# EAGLE board mcat-4cu-b-v2b.job (EAGLE 6.5.0)
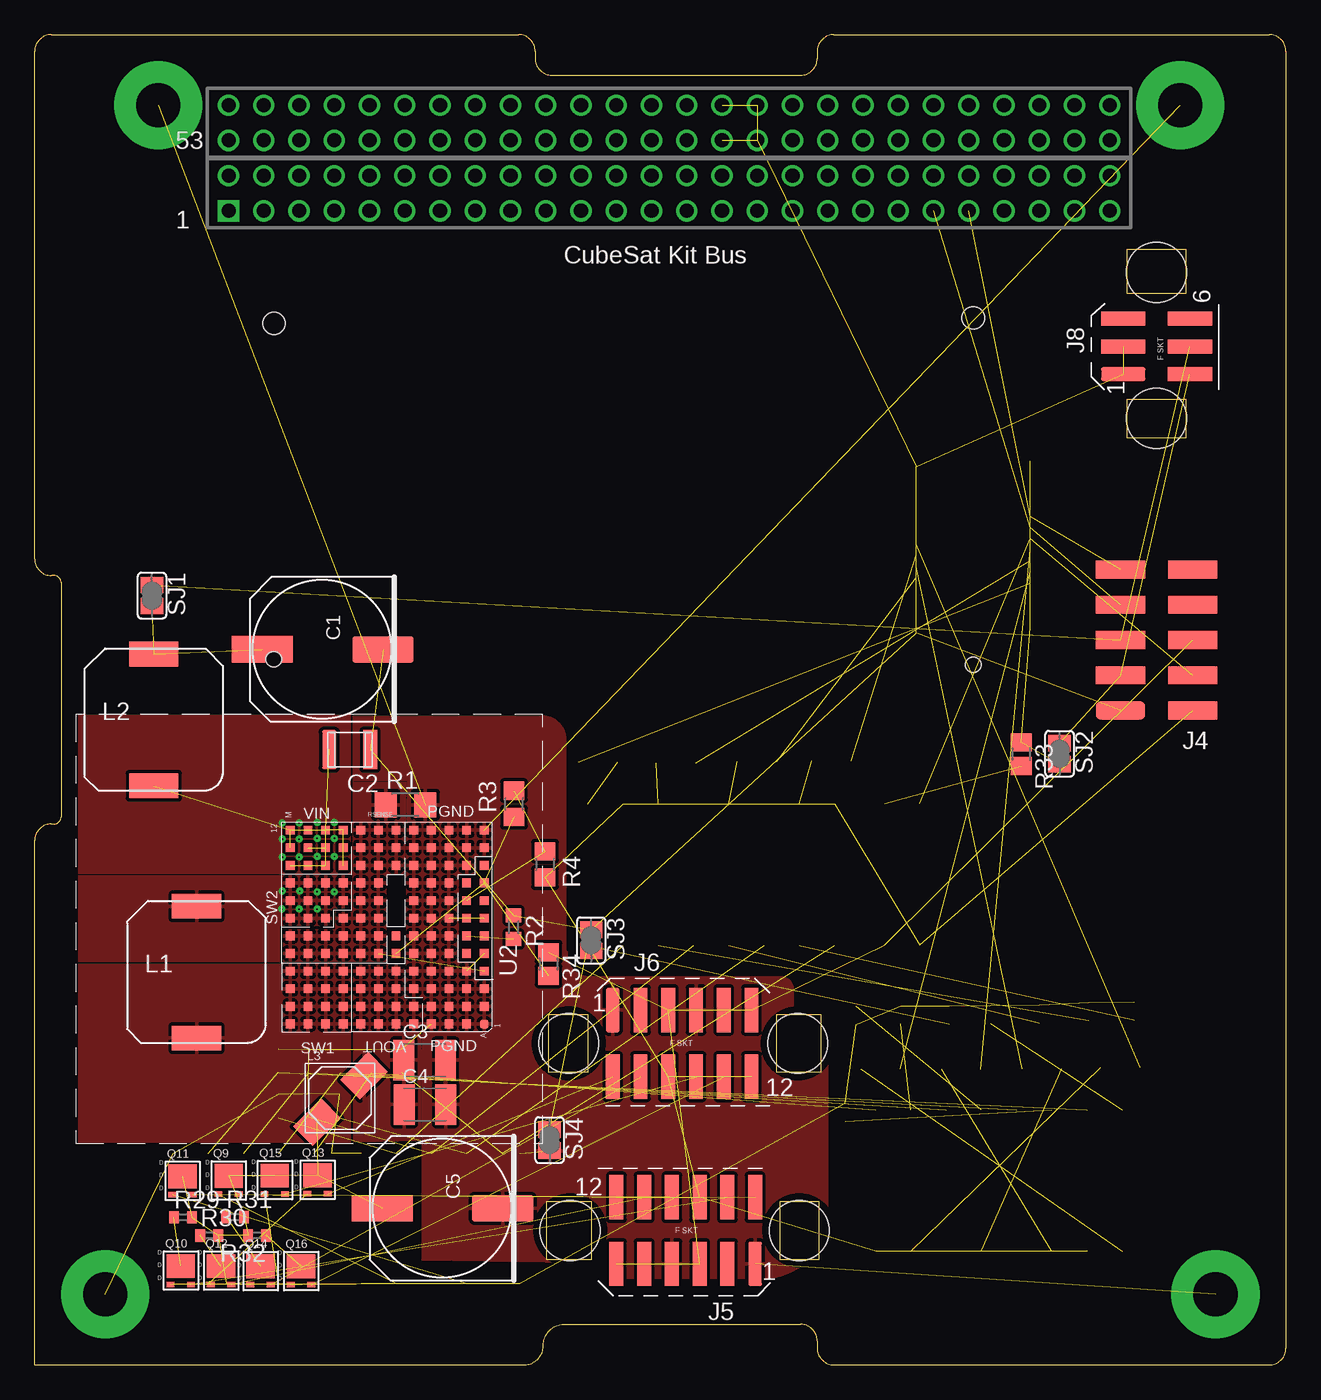
[diagram p0: board, top side]
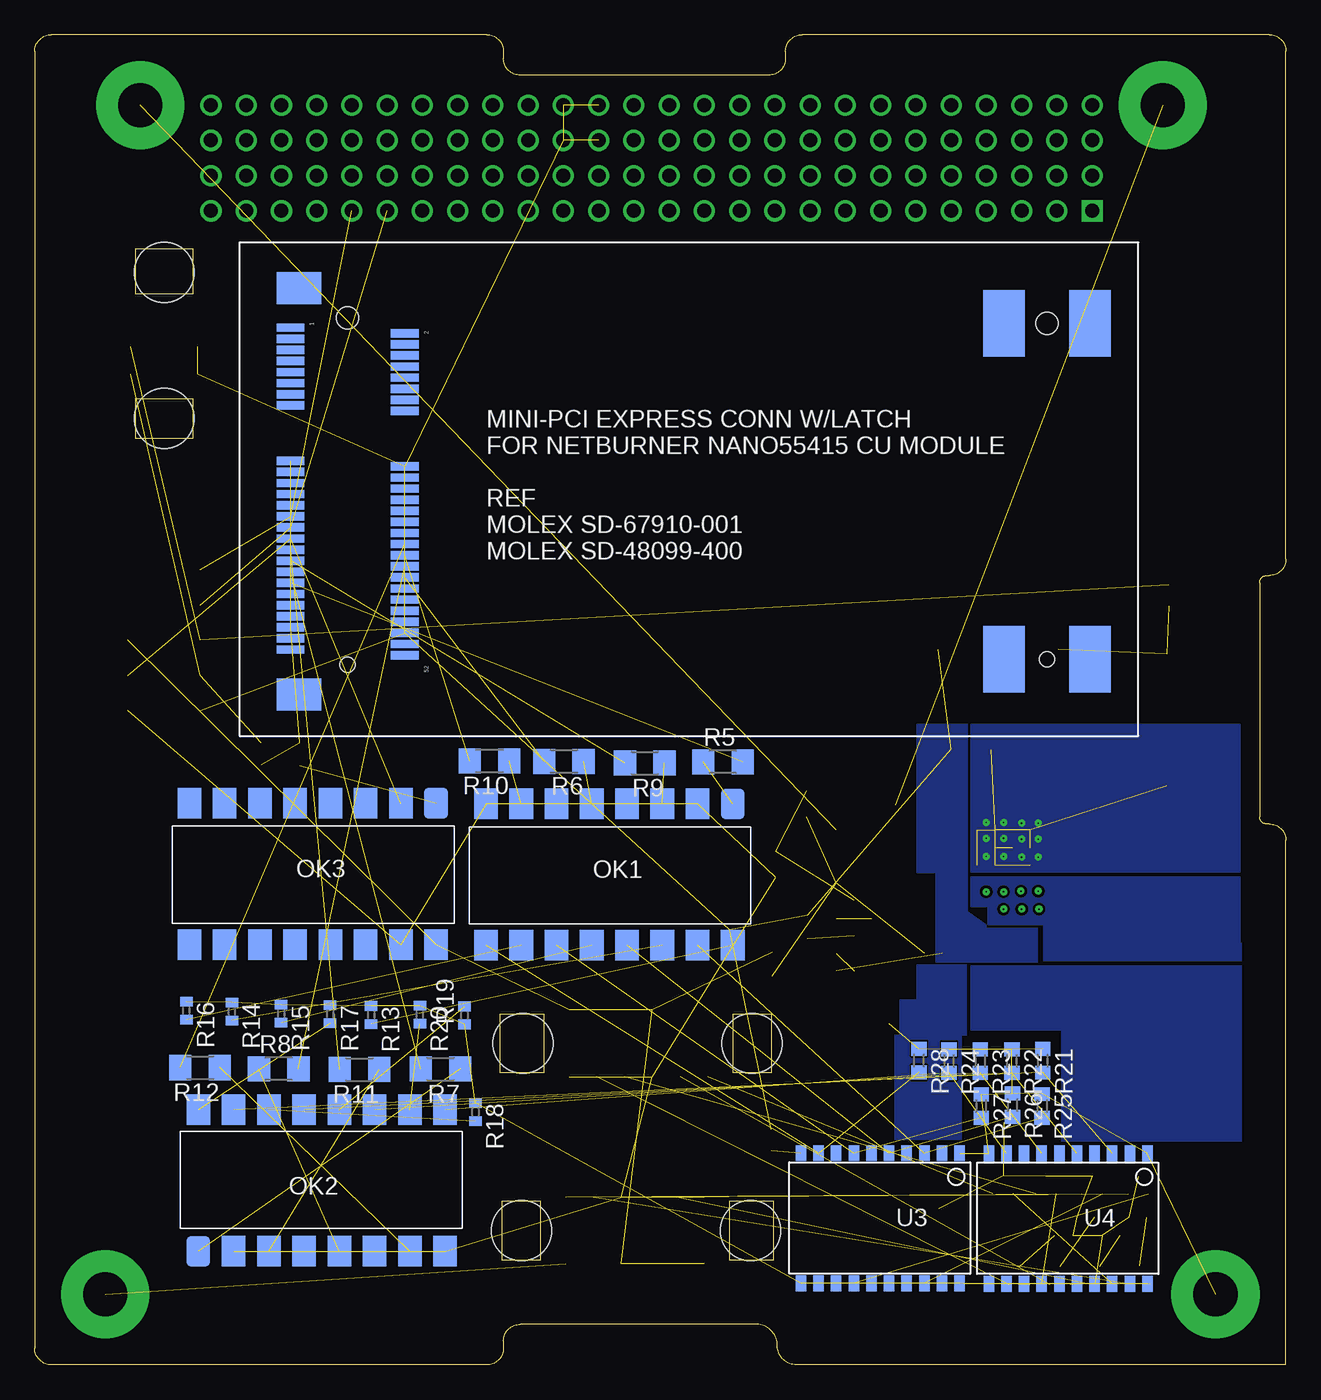
[diagram p1: board, bottom side, seen from below]

Size 90.17 x 95.89 mm. Coordinates in mm from the lower left corner, seen from the top.
Outline: 0,0 34.87,0 35.28,0 arc90 36.65,1.37 arc-90 38.12,2.92 55.19,2.92 arc-90 56.39,1.73 56.39,1.19 arc90 57.58,0 88.98,0 arc90 90.17,1.19 90.17,94.69 arc90 88.98,95.89 57.58,95.89 arc90 56.39,94.69 56.39,94.16 arc-90 55.19,92.96 37.26,92.96 arc-90 36.07,94.16 36.07,94.69 arc90 34.87,95.89 1.19,95.89 arc90 0,94.69 0,58.09 arc90 1.19,56.9 1.4,56.9 arc-90 1.91,56.39 1.91,39.5 arc-90 1.4,38.99 1.19,38.99 arc90 0,37.8 0,0
Copper layers [2:(1+(2*15)+16):15]: Top 0.0694mm / dielectric 8mil / Route2 0.0347mm / dielectric 3.5mil / Route15 0.0347mm / dielectric 8mil / Bottom 0.0694mm
Design rules "SSC-EAGLE-6Lyr_v1.0.0.3 *": minimum track width 6mil, minimum drill 6mil, track to track 6mil, track to pad 6mil, pad to pad 6mil, via to via 6mil, smd to smd 6mil, copper to edge 20mil, drill to drill 16mil, minimum pad ring 8mil, minimum via ring 8mil, stop-mask expansion 3mil, vias tented up to drill 0mil, thermal gap 10mil
Net classes: 0 default: clearance 0.205 mm; 1 vout1a2ozcu: width 0.406 mm; 2 vin3a2ozcu: width 1.778 mm

## Footprints (pad centres in the part's own frame; a part is rotated, then mirrored left to right if it is on the bottom)
OS-CON-SVPF-F12 = smd 1.9 x 4.4: A1 0,-4.3; K1 0,4.4
MLCC-X7R-1210 = smd 1 x 2.8: 1 1.6,0.05; 2 -1.35,0.05
C1210K = smd 1.5 x 2.9: 1 -1.5,0; 2 1.5,0
CSK_MOUNTING_HOLE = drill 3.175 pad 6.35: P$1 0,0
CSK-BUS-PKG = drill 1.016 pad 1.524 square: 1 -29.21,-3.81 | drill 1.016 pad 1.524: 2 -29.21,-1.27; 3 -26.67,-3.81; 4 -26.67,-1.27; 5 -24.13,-3.81; 6 -24.13,-1.27; 7 -21.59,-3.81; 8 -21.59,-1.27; 9 -19.05,-3.81; 10 -19.05,-1.27; 11 -16.51,-3.81; 12 -16.51,-1.27; 13 -13.97,-3.81; 14 -13.97,-1.27; 15 -11.43,-3.81; 16 -11.43,-1.27; 17 -8.89,-3.81; 18 -8.89,-1.27; 19 -6.35,-3.81; 20 -6.35,-1.27; 21 -3.81,-3.81; 22 -3.81,-1.27; 23 -1.27,-3.81; 24 -1.27,-1.27; 25 1.27,-3.81; 26 1.27,-1.27; 27 3.81,-3.81; 28 3.81,-1.27; 29 6.35,-3.81; 30 6.35,-1.27; 31 8.89,-3.81; 32 8.89,-1.27; 33 11.43,-3.81; 34 11.43,-1.27; 35 13.97,-3.81; 36 13.97,-1.27; 37 16.51,-3.81; 38 16.51,-1.27; 39 19.05,-3.81; 40 19.05,-1.27; 41 21.59,-3.81; 42 21.59,-1.27; 43 24.13,-3.81; 44 24.13,-1.27; 45 26.67,-3.81; 46 26.67,-1.27; 47 29.21,-3.81; 48 29.21,-1.27; 49 31.75,-3.81; 50 31.75,-1.27; 51 34.29,-3.81; 52 34.29,-1.27; 53 -29.21,1.27; 54 -29.21,3.81; 55 -26.67,1.27; 56 -26.67,3.81; 57 -24.13,1.27; 58 -24.13,3.81; 59 -21.59,1.27; 60 -21.59,3.81; 61 -19.05,1.27; 62 -19.05,3.81; 63 -16.51,1.27; 64 -16.51,3.81; 65 -13.97,1.27; 66 -13.97,3.81; 67 -11.43,1.27; 68 -11.43,3.81; 69 -8.89,1.27; 70 -8.89,3.81; 71 -6.35,1.27; 72 -6.35,3.81; 73 -3.81,1.27; 74 -3.81,3.81; 75 -1.27,1.27; 76 -1.27,3.81; 77 1.27,1.27; 78 1.27,3.81; 79 3.81,1.27; 80 3.81,3.81; 81 6.35,1.27; 82 6.35,3.81; 83 8.89,1.27; 84 8.89,3.81; 85 11.43,1.27; 86 11.43,3.81; 87 13.97,1.27; 88 13.97,3.81; 89 16.51,1.27; 90 16.51,3.81; 91 19.05,1.27; 92 19.05,3.81; 93 21.59,1.27; 94 21.59,3.81; 95 24.13,1.27; 96 24.13,3.81; 97 26.67,1.27; 98 26.67,3.81; 99 29.21,1.27; 100 29.21,3.81; 101 31.75,1.27; 102 31.75,3.81; 103 34.29,1.27; 104 34.29,3.81
AMPMODU-SMT-PIN-HEADER-5X2 = smd 1.27 x 3.556: 1 -4.826,2.54; 2 -2.286,2.54; 3 0.254,2.54; 4 2.794,2.54; 5 5.334,2.54; 6 -4.826,-2.667; 7 -2.286,-2.667; 8 0.254,-2.667; 9 2.794,-2.667; 10 5.334,-2.667
M80-68112 = smd 1 x 3.2: 1 0,2.4; 2 2,2.4; 3 4,2.4; 4 6,2.4; 5 8,2.4; 6 10,2.4; 7 0,-2.4; 8 2,-2.4; 9 4,-2.4; 10 6,-2.4; 11 8,-2.4; 12 10,-2.4 | hole 4.318: -3.175,0; 13.335,0
M80-68106 = smd 1 x 3.2: 1 -2,2.4; 2 0,2.4; 3 2,2.4; 4 -2,-2.4; 5 0,-2.4; 6 2,-2.4 | hole 4.318: -5.175,0; 5.335,0
MSS1048 = smd 3.56 x 1.78: 1 5,9.85; 2 5,0.35
SERIES-POWER-INDUCTORS = smd 2.85 x 2 rotated 45: 1 1.75,1.6; 2 -1.65,-1.75
PS2501L-4 = smd 2.2 x 1.7: 1 -1.6,19.03; 2 -1.6,16.49; 3 -1.6,13.95; 4 -1.6,11.41; 5 -1.6,8.87; 6 -1.6,6.33; 7 -1.6,3.79; 8 -1.6,1.25; 9 8.6,1.25; 10 8.6,3.79; 11 8.6,6.33; 12 8.6,8.87; 13 8.6,11.41; 14 8.6,13.95; 15 8.6,16.49; 16 8.6,19.03
1206-8-CHIPFET = smd 2.032 x 1.727: D 0,1.321 | smd 0.559 x 0.406: G -0.736,0; S 0.736,0
R1206 = smd 1.6 x 1.803: 1 -1.422,0; 2 1.422,0
R0603 = smd 1 x 1.1: 1 -0.85,0; 2 0.85,0
R0805 = smd 1.3 x 1.5: 1 -0.95,0; 2 0.95,0
R0402 = smd 0.7 x 0.9: 1 -0.65,0; 2 0.65,0
R0805' = smd 1.3 x 1.5: 1 -0.85,0; 2 0.85,0
SJ = smd 1.168 x 1.6: 1 -0.762,0; 2 0.762,0
MOLEX-MINI-PCI-EXPRESS-8MM-52CKT = smd 0.6 x 2: 1 -11.65,-26.8; 2 -11.248,-18.576; 3 -10.85,-26.8; 4 -10.447,-18.576; 5 -10.05,-26.8; 6 -9.648,-18.576; 7 -9.25,-26.8; 8 -8.848,-18.576; 9 -8.45,-26.8; 10 -8.047,-18.576; 11 -7.65,-26.8; 12 -7.247,-18.576; 13 -6.85,-26.8; 14 -6.447,-18.576; 15 -6.05,-26.8; 16 -5.647,-18.576; 17 -2.05,-26.8; 18 -1.647,-18.576; 19 -1.25,-26.8; 20 -0.848,-18.576; 21 -0.45,-26.8; 22 -0.048,-18.576; 23 0.35,-26.8; 24 0.752,-18.576; 25 1.15,-26.8; 26 1.552,-18.576; 27 1.95,-26.8; 28 2.353,-18.576; 29 2.75,-26.8; 30 3.152,-18.576; 31 3.55,-26.8; 32 3.953,-18.576; 33 4.35,-26.8; 34 4.753,-18.576; 35 5.15,-26.8; 36 5.553,-18.576; 37 5.95,-26.8; 38 6.353,-18.576; 39 6.75,-26.8; 40 7.152,-18.576; 41 7.55,-26.8; 42 7.952,-18.576; 43 8.35,-26.8; 44 8.752,-18.576; 45 9.15,-26.8; 46 9.553,-18.576; 47 9.95,-26.8; 48 10.352,-18.576; 49 10.75,-26.8; 50 11.152,-18.576; 51 11.55,-26.8; 52 11.953,-18.576 | smd 2.3 x 3.2: P$1 -14.5,-26.2; P$2 14.8,-26.2 | smd 4.8 x 3: P$3 12.25,24.6; P$4 -11.95,24.6; P$5 -11.95,30.8; P$6 12.25,30.8 | hole 1.6: -12.35,-22.7; -11.95,27.7 | hole 1.1: 12.65,-22.7; 12.25,27.7
LGA-141-LTC-05-08-1840-B = smd 0.63 x 0.63: A1 -7.116,-10.192; A2 -5.846,-10.192; A3 -4.576,-10.192; A4 -3.306,-10.192; A5 -2.036,-10.192; A6 -0.766,-10.192; A7 0.504,-10.192; A8 1.774,-10.192; A9 3.044,-10.192; A10 4.314,-10.192; A11 5.584,-10.192; A12 6.854,-10.192; B1 -7.116,-8.922; B2 -5.846,-8.922; B3 -4.576,-8.922; B4 -3.306,-8.922; B5 -2.036,-8.922; B6 -0.766,-8.922; B7 0.504,-8.922; B8 1.774,-8.922; B9 3.044,-8.922; B10 4.314,-8.922; B11 5.584,-8.922; B12 6.854,-8.922; C1 -7.116,-7.652; C2 -5.846,-7.652; C3 -4.576,-7.652; C4 -3.306,-7.652; C5 -2.036,-7.652; C6 -0.766,-7.652; C7 0.504,-7.652; C8 1.774,-7.652; C9 3.044,-7.652; C10 4.314,-7.652; C11 5.584,-7.652; C12 6.854,-7.652; D1 -7.116,-6.382; D2 -5.846,-6.382; D3 -4.576,-6.382; D4 -3.306,-6.382; D5 -2.036,-6.382; D6 -0.766,-6.382; D7 0.504,-6.382; D8 1.774,-6.382; D9 3.044,-6.382; D10 4.314,-6.382; D11 5.584,-6.382; D12 6.854,-6.382; E1 -7.116,-5.112; E2 -5.846,-5.112; E3 -4.576,-5.112; E4 -3.306,-5.112; E5 -2.036,-5.112; E6 -0.766,-5.112; E7 0.504,-5.112; E8 1.774,-5.112; E9 3.044,-5.112; E10 4.314,-5.112; E11 5.584,-5.112; E12 6.854,-5.112; F1 -7.116,-3.842; F2 -5.846,-3.842; F3 -4.576,-3.842; F4 -3.306,-3.842; F5 -2.036,-3.842; F6 -0.766,-3.842; F10 4.314,-3.842; F11 5.584,-3.842; F12 6.854,-3.842; G1 -7.116,-2.572; G2 -5.846,-2.572; G3 -4.576,-2.572; G4 -3.306,-2.572; G5 -2.036,-2.572; G6 -0.766,-2.572; G7 0.504,-2.572; G8 1.774,-2.572; G9 3.044,-2.572; G10 4.314,-2.572; G11 5.584,-2.572; G12 6.854,-2.572; H2 -5.846,-1.302; H3 -4.576,-1.302; H4 -3.306,-1.302; H5 -2.036,-1.302; H6 -0.766,-1.302; H7 0.504,-1.302; H8 1.774,-1.302; H9 3.044,-1.302; H10 4.314,-1.302; H11 5.584,-1.302; H12 6.854,-1.302; J5 -2.036,-0.032; J6 -0.766,-0.032; J7 0.504,-0.032; J8 1.774,-0.032; J9 3.044,-0.032; J10 4.314,-0.032; J11 5.584,-0.032; J12 6.854,-0.032; K5 -2.036,1.238; K6 -0.766,1.238; K7 0.504,1.238; K8 1.774,1.238; K9 3.044,1.238; K10 4.314,1.238; K11 5.584,1.238; K12 6.854,1.238; L5 -2.036,2.508; L6 -0.766,2.508; L7 0.504,2.508; L8 1.774,2.508; L9 3.044,2.508; L10 4.314,2.508; L11 5.584,2.508; L12 6.854,2.508; M5 -2.036,3.778; M6 -0.766,3.778; M7 0.504,3.778; M8 1.774,3.778; M9 3.044,3.778; M10 4.314,3.778; M11 5.584,3.778; M12 6.854,3.778; SW1@J1 -7.116,-0.032; SW1@J2 -5.846,-0.032; SW1@J3 -4.576,-0.032; SW1@J4 -3.306,-0.032; SW1@K1 -7.116,1.238; SW1@K2 -5.846,1.238; SW1@K3 -4.576,1.238; SW1@K4 -3.306,1.238; SW1@L1 -7.116,2.508; SW1@L2 -5.846,2.508; SW1@L3 -4.576,2.508; SW1@L4 -3.306,2.508; SW1@M1 -7.116,3.778; SW1@M2 -5.846,3.778; SW1@M3 -4.576,3.778; SW1@M4 -3.306,3.778; VOUT -7.116,-1.302
20-LEAD-PLASTIC-SO = smd 0.762 x 1.143: 1 0,0; 2 1.27,0; 3 2.54,0; 4 3.81,0; 5 5.08,0; 6 6.35,0; 7 7.62,0; 8 8.89,0; 9 10.16,0; 10 11.43,0; 11 11.43,9.398; 12 10.16,9.398; 13 8.89,9.398; 14 7.62,9.398; 15 6.35,9.398; 16 5.08,9.398; 17 3.81,9.398; 18 2.54,9.398; 19 1.27,9.398; 20 0,9.398

## Placement (x,y rotation side)
C1  68uF  [OS-CON-SVPF-F12]  20.7,51.57 270 top
C2  4.7uF  [MLCC-X7R-1210]  22.83,44.4 180 top
C3  10uF  [C1210K]  28.1,21.97 0 top
C4  10uF  [C1210K]  28.13,18.76 0 top
C5  68uF  [OS-CON-SVPF-F12]  29.34,11.28 270 top
H1  MOUNT-PAD-ROUNDCSK_MTG_HOLE_A5  [CSK_MOUNTING_HOLE]  8.89,90.81 0 top
H2  MOUNT-PAD-ROUNDCSK_MTG_HOLE_A5  [CSK_MOUNTING_HOLE]  82.55,90.81 0 top
H3  MOUNT-PAD-ROUNDCSK_MTG_HOLE_A5  [CSK_MOUNTING_HOLE]  85.09,5.08 0 top
HBL  MOUNT-PAD-ROUNDCSK_MTG_HOLE_A5  [CSK_MOUNTING_HOLE]  5.08,5.08 0 top
J2  [CSK-BUS-PKG]  43.18,87 0 top
J4  AMPMODU 5X2 SMT HDR  [AMPMODU-SMT-PIN-HEADER-5X2]  80.78,51.99 90 top
J5  M80-6811242  [M80-68112]  51.92,9.68 180 top
J6  M80-6811242  [M80-68112]  41.66,23.17 0 top
J8  M80-6810642  [M80-68106]  80.84,73.41 90 top
L1  330 uH  [MSS1048]  6.66,23.2 0 top
L2  33 uH  [MSS1048]  3.58,41.39 0 top
L3  10 uH  [SERIES-POWER-INDUCTORS]  21.99,19.23 0 top
OK1  PS2501L-4  [PS2501L-4]  58.9,38.84 270 bottom
OK2  PS2501L-4  [PS2501L-4]  59.34,9.79 90 bottom
OK3  PS2501L-4  [PS2501L-4]  80.28,38.88 270 bottom
Q9  SI5404BDC  [1206-8-CHIPFET]  13.98,12.3 0 top
Q10  SI5404BDC  [1206-8-CHIPFET]  10.53,5.8 0 top
Q11  SI5404BDC  [1206-8-CHIPFET]  10.65,12.27 0 top
Q12  SI5404BDC  [1206-8-CHIPFET]  13.42,5.8 0 top
Q13  SI5404BDC  [1206-8-CHIPFET]  20.38,12.34 0 top
Q14  SI5404BDC  [1206-8-CHIPFET]  16.27,5.77 0 top
Q15  SI5404BDC  [1206-8-CHIPFET]  17.3,12.32 0 top
Q16  SI5404BDC  [1206-8-CHIPFET]  19.19,5.77 0 top
R1  70 mOhms  [R1206]  26.72,40.37 0 top
R2  4k7 0.1%  [R0603]  34.5,31.54 270 top
R3  3K79  [R0805]  34.54,40.43 90 top
R4  1K  [R0805]  36.78,36.07 270 top
R5  5K42 0.1%  [R1206]  40.58,43.47 0 bottom
R6  5K42 0.1%  [R1206]  52.04,43.51 180 bottom
R7  5K42 0.1%  [R1206]  60.94,21.32 180 bottom
R8  5K42 0.1%  [R1206]  72.59,21.34 0 bottom
R9  5K42 0.1%  [R1206]  46.21,43.37 180 bottom
R10  5K42 0.1%  [R1206]  57.4,43.53 180 bottom
R11  5K42 0.1%  [R1206]  66.77,21.3 180 bottom
R12  5K42 0.1%  [R1206]  78.26,21.42 180 bottom
R13  100K 0.1%  [R0402]  65.92,25.22 270 bottom
R14  100K 0.1%  [R0402]  75.96,25.46 270 bottom
R15  100K 0.1%  [R0402]  72.41,25.31 270 bottom
R16  100K 0.1%  [R0402]  79.24,25.53 270 bottom
R17  100K 0.1%  [R0402]  68.87,25.28 270 bottom
R18  100K 0.1%  [R0402]  58.41,18.22 270 bottom
R19  100K 0.1%  [R0402]  59.2,25.19 90 bottom
R20  100K 0.1%  [R0402]  62.42,25.24 270 bottom
R21  51K 0.1%  [R0603]  17.54,21.92 270 bottom
R22  51K 0.1%  [R0603]  19.75,21.89 270 bottom
R23  51K 0.1%  [R0603]  22.04,21.9 270 bottom
R24  51k 0.1%  [R0603]  24.28,21.89 270 bottom
R25  51K 0.1%  [R0603]  17.57,18.66 270 bottom
R26  51K 0.1%  [R0603]  19.71,18.72 270 bottom
R27  51K 0.1%  [R0603]  21.97,18.65 270 bottom
R28  51k 0.1%  [R0603]  26.45,21.93 270 bottom
R29  0.1R 1% PTC  [R0402]  10.68,10.63 0 top
R30  0.1R 1% PTC  [R0402]  12.58,9.33 0 top
R31  0.1R 1% PTC  [R0402]  14.44,10.66 0 top
R32  0.1R 1% PTC  [R0402]  16.02,9.33 180 top
R33  1K  [R0805']  71.09,44.03 270 top
R34  604R  [R0805']  37.03,28.89 270 top
SJ1  [SJ]  8.45,55.45 270 top
SJ2  [SJ]  73.85,44.05 270 top
SJ3  [SJ]  40.1,30.6 270 top
SJ4  [SJ]  37.1,16.2 270 top
U1  UCAT-4CU-B-CONTROL-UNITNANO55415  [MOLEX-MINI-PCI-EXPRESS-8MM-52CKT]  44.93,63.11 270 bottom
U2  LTM4609MPV#PBF  [LGA-141-LTC-05-08-1840-B]  22.2,31.69 90 top
U3  LT1161ISW  [20-LEAD-PLASTIC-SO]  23.52,15.26 180 bottom
U4  LT1161ISW  [20-LEAD-PLASTIC-SO]  9.98,15.25 180 bottom

## Library data of the parts
C1 C2 C5 J2 J4-J6 J8 L1 L2 OK1-OK3 Q9-Q16 U1-U4 = gwu_mpnl_ucat_v8
C3 C4 R3 R4 R29-R32 = rcl
H1-H3 HBL = mpnl_holes
L3 = gwu_mpnl_ucat_v8; MF: PANASONIC; MPN: ELL5PS100M; OC_FARNELL: 1717452
R1 R2 R5-R28 R33 R34 = resistor
SJ1-SJ4 = jumper

## Nets
CH1_P18H [vout1a2ozcu]: J5.8 Q10.S
CH1_P18L: J5.7 Q9.S
CH1HG: Q10.G U3.16
CH1LG: Q9.G U3.18
CH1S: Q10.D R29.1
CH2_P18H [vout1a2ozcu]: J5.11 Q12.S
CH2_P18L: J5.10 Q11.S
CH2HG: Q12.G U3.12
CH2LG: Q11.G U3.14
CH2S: Q12.D R30.1
CH3_P18H [vout1a2ozcu]: J6.8 Q14.S
CH3_P18L: J6.7 Q13.S
CH3HG: Q14.G U4.16
CH3LG: Q13.G U4.18
CH3S: Q14.D R31.1
CH4_P18H [vout1a2ozcu]: J6.11 Q16.S
CH4_P18L: J6.10 Q15.S
CH4HG: Q16.G U4.12
CH4LG: Q15.G U4.14
CH4S: Q16.D R32.1
GND: C1.K1 C2.2 J2.81 J2.82 J2.83 J2.84 J4.1 J8.1 J8.2 R2.1 SJ3.1 SJ4.1 U1.18 U1.48
I2C(CLK): J2.43 J4.5 U1.27
I2C(DATA): J2.41 J4.4 U1.29
INTVCC: R3.1 R34.2 U2.A9 U2.F5
N$4: OK1.16 R13.2
N$5: OK1.14 R14.2
N$7: OK1.12 R15.2
N$8: R2.2 U2.B6
N$9: OK1.10 R16.2
N$10: OK2.16 R17.2
N$11: OK2.14 R18.2
N$12: OK2.12 R19.2
N$13: OK2.10 R20.2
N$16: OK3.1 R33.2
N$18: J6.5
OK1E1: OK1.15 R25.2 U3.3
OK1E2: OK1.13 R26.2 U3.5
OK1E3: OK1.11 R27.2 U3.7
OK1E4: OK1.9 R28.2 U3.9
OK2E1: OK2.15 R21.2 U4.3
OK2E2: OK2.13 R22.2 U4.5
OK2E3: OK2.11 R23.2 U4.7
OK2E4: OK2.9 R24.2 U4.9
P3: R33.1 SJ2.2 U1.17 U1.47
P3_SW: J4.2 J8.4 SJ2.1
P18_SW1: OK1.1 R5.1
P18_SW2: OK1.5 R6.1
P18_SW3: OK2.1 R7.1
P18_SW4: OK2.5 R8.1
P18_SW5: OK1.3 R9.1
P18_SW6: OK1.7 R10.1
P18_SW7: OK2.3 R11.1
P18_SW8: OK2.7 R12.1
PBATT_SW [vin3a2ozcu]: J4.3 J8.5 SJ1.1
PGND: C3.2 C4.2 C5.K1 H1.P$1 H2.P$1 H3.P$1 HBL.P$1 J5.1 J5.4 J6.1 J6.4 R1.2 R21.1 R22.1 R23.1 R24.1 R25.1 R26.1 R27.1 R28.1 SJ4.2 U2.A1 U2.A2 U2.A3 U2.A5 U2.A7 U2.A11 U2.A12 U2.B1 U2.B2 U2.B3 U2.B4 U2.B10 U2.B11 U2.B12 U2.C1 U2.C2 U2.C3 U2.C4 U2.C5 U2.C6 U2.C7 U2.C8 U2.C9 U2.C10 U2.C11 U2.C12 U2.D1 U2.D2 U2.D3 U2.D4 U2.D5 U2.D6 U2.D7 U2.D8 U2.D9 U2.D10 U2.D11 U2.D12 U2.E3 U2.E4 U2.E5 U2.E6 U2.E7 U2.E8 U2.E9 U2.E10 U2.E11 U2.E12 U3.1 U3.10 U4.1 U4.10
PGOOD_PMA: U2.B5
RSENSE: R1.1 U2.A4 U2.F10 U2.F11 U2.F12 U2.G5 U2.G6 U2.G7 U2.G8 U2.G9 U2.G10 U2.G11 U2.G12 U2.H5 U2.H6 U2.H7 U2.H8 U2.H9 U2.H10 U2.H11 U2.H12 U2.J5 U2.J6 U2.J7 U2.K5 U2.K6 U2.L5 U2.L6 U2.M5 U2.M6
RUN_PMA: U2.A8
SETFREQ: R3.2 R4.1 U2.B8
SGND: J4.6 J5.9 J5.12 J6.9 J6.12 OK1.2 OK1.4 OK1.6 OK1.8 OK2.2 OK2.4 OK2.6 OK2.8 OK3.15 R4.2 SJ3.2
SS: C2.1 L2.2 U2.J10 U2.J11 U2.J12 U2.K10 U2.K11 U2.K12 U2.L10 U2.L11 U2.L12 U2.M10 U2.M11 U2.M12
SW1 [vout1a2ozcu]: L1.2 U2.SW1@J1 U2.SW1@J2 U2.SW1@J3 U2.SW1@J4 U2.SW1@K1 U2.SW1@K2 U2.SW1@K3 U2.SW1@K4 U2.SW1@L1 U2.SW1@L2 U2.SW1@L3 U2.SW1@L4 U2.SW1@M1 U2.SW1@M2 U2.SW1@M3 U2.SW1@M4
SW2: L1.1 U2.J8 U2.J9 U2.K7 U2.K8 U2.K9 U2.L7 U2.L8 U2.L9 U2.M7 U2.M8 U2.M9
SW_P18H1: R9.2 U1.35
SW_P18H2: R10.2 U1.34
SW_P18H3: R11.2 U1.33
SW_P18H4: R12.2 U1.32
SW_P18L1: R5.2 U1.39
SW_P18L2: R6.2 U1.38
SW_P18L3: R7.2 U1.37
SW_P18L4: R8.2 U1.36
SW_RUNPMA: U1.23
SW_TP1: J4.7 OK3.2 U1.31
TP1_OUT: J4.8 J5.3 J5.6 J6.3 J6.6 OK3.16 R34.1
VBATT_IN [vin3a2ozcu]: C1.A1 L2.1 SJ1.2
VOUT [vout1a2ozcu]: C3.1 C4.1 L3.1 U2.E1 U2.E2 U2.F1 U2.F2 U2.F3 U2.F4 U2.G1 U2.G2 U2.G3 U2.G4 U2.H2 U2.H3 U2.H4 U2.VOUT
VOUTA [vout1a2ozcu]: C5.A1 L3.2 Q9.D Q11.D Q13.D Q15.D R13.1 R14.1 R15.1 R16.1 R17.1 R18.1 R19.1 R20.1 R29.2 R30.2 R31.2 R32.2 U3.11 U3.13 U3.15 U3.17 U3.19 U3.20 U4.11 U4.13 U4.15 U4.17 U4.19 U4.20

## Tracks (layer width: path | path; a pad name or v marks a point on that pad's centre or on a via)
CH1_P18H  (1 unrouted)
CH1_P18L  (1 unrouted)
CH1HG  (1 unrouted)
CH1LG  (1 unrouted)
CH1S  (1 unrouted)
CH2_P18H  (1 unrouted)
CH2_P18L  (1 unrouted)
CH2HG  (1 unrouted)
CH2LG  (1 unrouted)
CH2S  (1 unrouted)
CH3_P18H  (1 unrouted)
CH3_P18L  (1 unrouted)
CH3HG  (1 unrouted)
CH3LG  (1 unrouted)
CH3S  (1 unrouted)
CH4_P18H  (1 unrouted)
CH4_P18L  (1 unrouted)
CH4HG  (1 unrouted)
CH4LG  (1 unrouted)
CH4S  (1 unrouted)
GND  (13 unrouted)
I2C(CLK)  (2 unrouted)
I2C(DATA)  (2 unrouted)
INTVCC  (3 unrouted)
N$2
  cutout Top (isolate 0.254): 32.84,27.78 31.78,27.78 31.78,29.03 30.59,29.03 30.59,35.34 31.84,35.34 31.84,36.59 33.03,36.59 33.03,27.78 32.21,27.78
N$3
  pour Bottom: 22.7,35.2 22.7,33 21.5,33 21.5,32.8 21.5,31.7 17.6,31.7 17.5,31.7 17.5,29.1 3.2,29.1 3.2,30.4 3.3,30.4 3.3,35.2
N$4  (1 unrouted)
N$5  (1 unrouted)
N$7  (1 unrouted)
N$8  (1 unrouted)
N$9  (1 unrouted)
N$10  (1 unrouted)
N$11  (1 unrouted)
N$12  (1 unrouted)
N$13  (1 unrouted)
N$16  (1 unrouted)
OK1E1  (2 unrouted)
OK1E2  (2 unrouted)
OK1E3  (2 unrouted)
OK1E4  (2 unrouted)
OK2E1  (2 unrouted)
OK2E2  (2 unrouted)
OK2E3  (2 unrouted)
OK2E4  (2 unrouted)
P3  (3 unrouted)
P3_SW  (2 unrouted)
P18_SW1  (1 unrouted)
P18_SW2  (1 unrouted)
P18_SW3  (1 unrouted)
P18_SW4  (1 unrouted)
P18_SW5  (1 unrouted)
P18_SW6  (1 unrouted)
P18_SW7  (1 unrouted)
P18_SW8  (1 unrouted)
PBATT_SW  (2 unrouted)
PGND  (18 unrouted)
  pour Top (isolate 0.254): 22.9,46.78 36.5,46.8 36.6,46.8 arc-90 38.3,45.1 38.3,29.9 arc90 38.4,29.8 38.4,29.6 arc90 40,28 53.8,28 arc-90 54.7,27.1 54.7,24.3 arc90 55.4,23.6 arc90 55.5,23.5 55.7,23.5 arc-90 57.2,22 57.2,10.9 arc-90 52.5,6.2 40.95,6.2 arc-61 39.02,7.34 27.9,7.54 27.9,22.15 28.03,26.53 26.78,26.53 26.78,29.03 26.77,29.03 26.78,29.15 26.78,36.97 26.84,42.09 22.9,42.09
RSENSE  (1 unrouted)
  pour Top (isolate 0.254): 17.9,29.03 17.9,31.4 21.65,31.4 21.65,32.65 22.9,32.65 22.9,42.03 26.78,42.03 26.65,35.4 25.34,35.4 25.34,29.03
  pour Bottom: 17.9,31.5 21.6,31.5 21.6,31.75 22.95,32.7 22.95,33.35 22.95,39.55 22.95,46.2 26.6,46.2 26.6,38.95 26.6,35.75 26.6,35.45 25.25,35.45 25.25,33 25.25,29 17.9,29
SETFREQ  (2 unrouted)
SGND  (15 unrouted)
SS  (13 unrouted)
SW1
  pour Top (isolate 0.254): 22.78,28.9 3.15,28.9 3.15,16.03 22.78,16.03
  pour Bottom: 22.7,28.8 20.4,28.8 3.2,28.8 3.2,28.4 3.2,27.1 3.2,20.9 3.2,18.4 3.2,16.1 16.2,16.1 16.2,24.1 22.7,24.1 22.7,24.4
SW2  (via drill 0.1 pad 0.25)
  other vias: 17.85,34.15 19.1,34.15 20.35,34.1 21.6,34.1 20.35,32.85 19.05,32.85 17.8,32.85
  pour Top (isolate 0.254): 17.65,29.03 17.65,31.65 21.4,31.65 21.4,32.9 22.78,32.9 22.78,35.28 3.15,35.28 3.15,29.03
SW_P18H1  (1 unrouted)
SW_P18H2  (1 unrouted)
SW_P18H3  (1 unrouted)
SW_P18H4  (1 unrouted)
SW_P18L1  (1 unrouted)
SW_P18L2  (1 unrouted)
SW_P18L3  (1 unrouted)
SW_P18L4  (1 unrouted)
SW_TP1  (2 unrouted)
TP1_OUT  (6 unrouted)
VBATT_IN  (2 unrouted)
VIN  (via drill 0.1 pad 0.25)
  other vias: 19.05,37.9 20.35,37.95 21.6,37.95 17.85,37.9 19.05,39.05 20.35,39.1 21.6,39.1 17.85,39.05 19.05,36.6 20.35,36.65 21.6,36.65 17.85,36.6
  pour Bottom: 22.7,35.5 22.7,37.8 22.7,39.9 22.7,43 22.7,46.2 3.3,46.2 3.3,45.9 3.3,38.7 3.3,35.6 3.3,35.5
  pour Top (isolate 0.254): 22.78,35.4 22.78,46.84 3.15,46.88 3.15,35.4
VOUT
  pour Top (isolate 0.254): 22.96,28.84 22.96,16.03 27.8,16.13 27.8,18.44 27.84,22.78 27.84,26.34 26.59,26.34 26.59,28.84
  pour Bottom: 23,28.85 26.6,28.85 26.6,26.35 26.65,26.35 27.85,26.35 27.85,23.8 28.2,23.8 28.2,16.9 28.2,16.2 23.35,16.2 23.35,23.75 23,23.75 23,24.95
VOUTA  (29 unrouted)